# Altium PCB SampleCompact2.PcbDoc
Units mil, origin at the board's own origin, x right, y up, seen from the top; angles counter-clockwise.
Board outline 480 x 400 mil, 2 copper layers (Top Layer, Bottom Layer); 5 components, 5 nets, 19 pads, 0 vias.
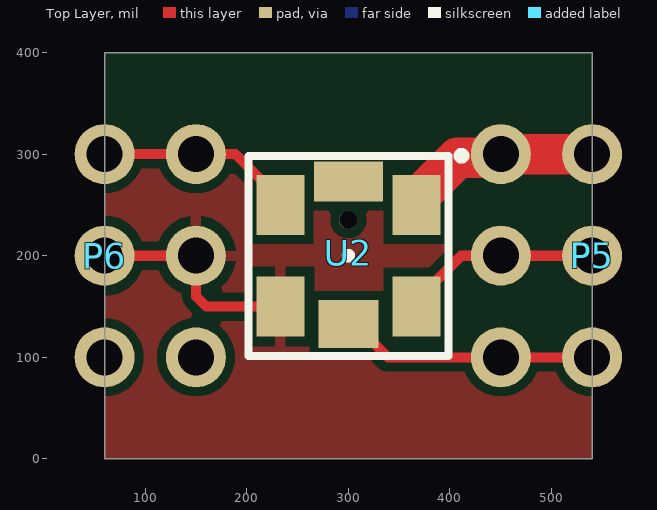
[diagram p0: Top Layer view]
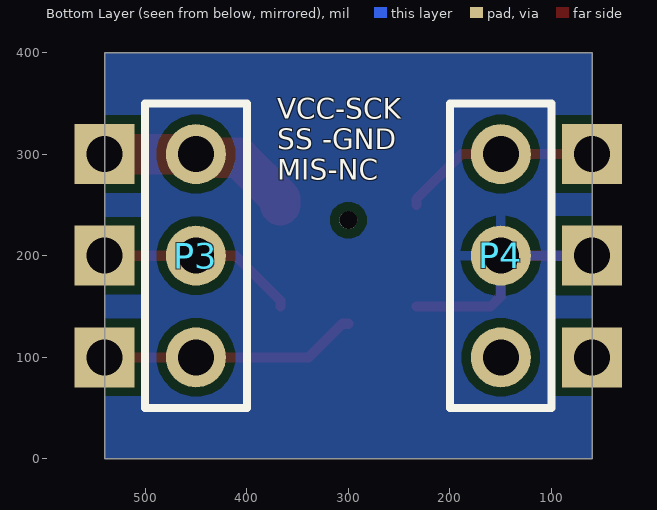
[diagram p1: Bottom Layer view, seen from below]

## Layer stack, top to bottom
Top Solder: solder mask 0.4, Solder Resist, Dk 3.5
Top Layer: signal copper 1.4
Dielectric 1: dielectric 12.6, FR-4, Dk 4.8
Bottom Layer: signal copper 1.4
Bottom Solder: solder mask 0.4, Solder Resist, Dk 3.5

## Board outline
60,0 60,400 540,400 540,0

## Design rules (kind name [scope] priority, off if disabled: settings)
Clearance [All] p1: gap=9 ignorepadtopadclearanceinfootprint=FALSE
PolygonConnect [All] p1: connectstyle=Relief reliefconductorwidth=10 reliefentries=4 polygonreliefangle="90 Angle" airgapwidth=10
RoutingVias [All] p1: holewidth=28 width=50 viastyle="Through Hole" minholewidth=28 minwidth=50 maxholewidth=28 maxwidth=50
SolderMaskExpansion [All] p1: expansion=4 istentingtop=FALSE
Width [All] p1: maxlimit=40 minlimit=10 preferedwidth=10
30 further rules are at their usual default settings.

## Components (designator, comment, footprint, x,y, rotation, side; value= is the part's Value field where it differs from the comment)
P3 "Header 3" HDR1X3 450,300 r270 bottom
P4 "Header 3" HDR1X3 150,300 r270 bottom
P5 "Header 3 Stamp" "HDR1X3 - stamp" 540,300 r270 top
P6 "Header 3 Stamp" "HDR1X3 - stamp" 60,300 r270 top
U2 "FMAMSDXX005WCSC3" FMA_MICROFORCE_6 366.93,249.96 r270 top

## Footprints (in the part's own frame and the unit in brackets; to place one, negate y for a bottom-side part, rotate by r counter-clockwise, add the part's x,y. Pads: shape width x height; smd on the part's side, far side on the other; paste and mask are expansions set on the pad)
FMA_MICROFORCE_6 [mm]
  round 0.45 hole 0.45 unplated: 0(0.38,-1.7)
  rect 1.5x1.2 smd: 1(0,0) 2(2.54,0) 3(2.54,-3.4) 4(0,-3.4)
  rect 1.2x1.5 smd: 5(2.97,-1.7)
  rect 1x1.73 smd: 6(-0.59,-1.7)
  silkscreen extent -1.3,-4.2 3.77,1.2, body extent -1.23,-4.2 3.77,0.8, height 2.55
HDR1X3 [mm] "Connector; Header; 3 Position"
  round 1.5 hole 0.9: 1(0,0) 2(2.54,0) 3(5.08,0)
  silkscreen extent -1.27,-1.27 6.35,1.27
"HDR1X3 - stamp" [mm] "Connector; Header; 3 Position"
  round 1.5 / inner round 1.5 / far side rect 1.5x1.5 hole 0.9: 1(0,0) 2(2.54,0) 3(5.08,0)

## Part data
P3 P4: "Header, 3-Pin", LatestRevisionDate=17-Jul-2002, LatestRevisionNote="Re-released for DXP Platform.", Publisher="Altium Limited"
P5 P6: "Header, 3-Pin, Stamp", LatestRevisionDate=17-Jul-2002, LatestRevisionNote="Re-released for DXP Platform.", Publisher="Altium Limited"
U2: "Force Range: 5N  / Output: SPI  / FMA Series Force Sensor, compensated/amplified, mechanically  / coupled, sphere contact element, sensor short and open  / diagnostics, 5 N force range, compression force type, SPI digital  / output, 20% to 80% transfer function, 3.3 V ±10% supply voltage"

## Nets (pads, with @x,y where several pads share a name; then routed paths per layer and width w, separated by ;. In a path a pad name is that pad's centre, name@x,y a point inside that pad or via, vN(x,y) a via of type N, cw(c..) or ccw(c..) an arc to the next point about the centre after c; other vN are vias at no path point)
GND: P4.2 P6.2 U2.3 | length 217.2
  Top Layer w10: P6.2 P4.2 150,160 160,150 233.03,150 U2.3
MISO: P3.3 P5.3 U2.5 | length 253.7
  Top Layer w10: U2.5 305.91,133.03 338.94,100 P3.3 P5.3
SCLK: P4.1 P6.1 U2.4 | length 197.3
  Top Layer w10: P6.1 P4.1 188.94,300 233.07,255.87 U2.4
SS: P3.2 P5.2 U2.2 | length 197.3
  Top Layer w10: U2.2 366.93,155.87 411.06,200 P3.2 P5.2
VCC: P3.1 P5.1 U2.1 | length 197.3
  Top Layer w40: U2.1 366.93,255.87 407.42,296.35 446.35,296.35 P3.1 P5.1
pads on no net: P4.3 P6.3 U2.0 U2.6

## Polygon pours and split planes (outlines as drawn)
GND on Bottom Layer "GND_L02_P001" (solid, remove dead copper, pour order 1): 59.72,400 540.28,400 540.28,0 59.72,0
GND on Top Layer "GND_L01_P000" (solid, remove dead copper, pour order 0): 59.72,400 540.28,400 540.28,0 59.72,0

## Silkscreen, mask and mechanical layers (free items; w line width, h text height)
Bottom Overlay:
  text "VCC-SCK / SS -GND / MIS-NC" at 370,275 h20
Mechanical 1:
  lines w20: 60,400 60,0 540,0 540,400 ; 60.55,400 540.55,400